# Altium PCB PCBSM.PcbDoc
Units mil, origin at the board's own origin, x right, y up, seen from the top; angles counter-clockwise.
Board outline 11240 x 9575 mil, 2 copper layers (Top Layer, Bottom Layer); 128 components, 74 nets, 410 pads, 4 vias.
Unrouted connection lines stored in the file: 65.
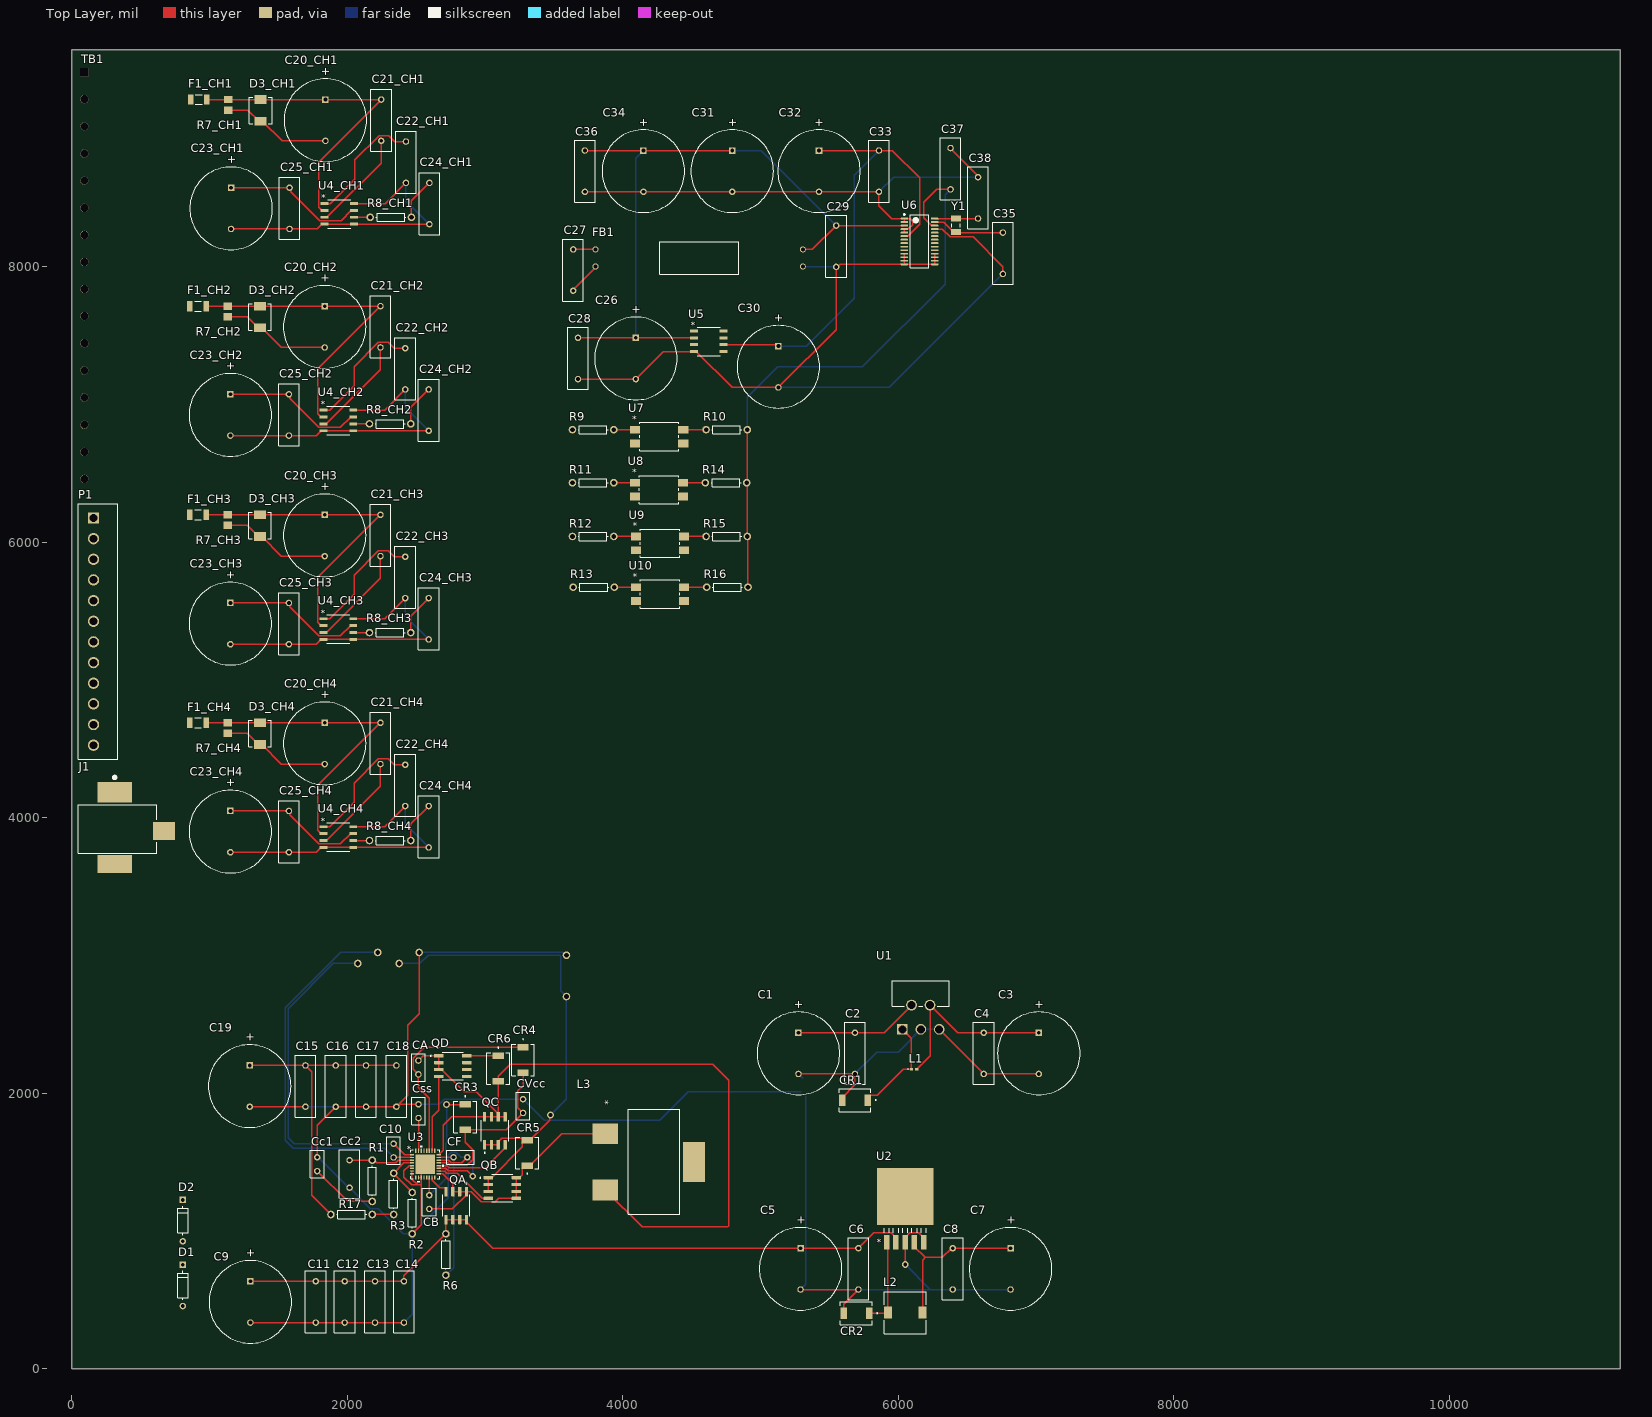
[diagram p0: Top Layer view]
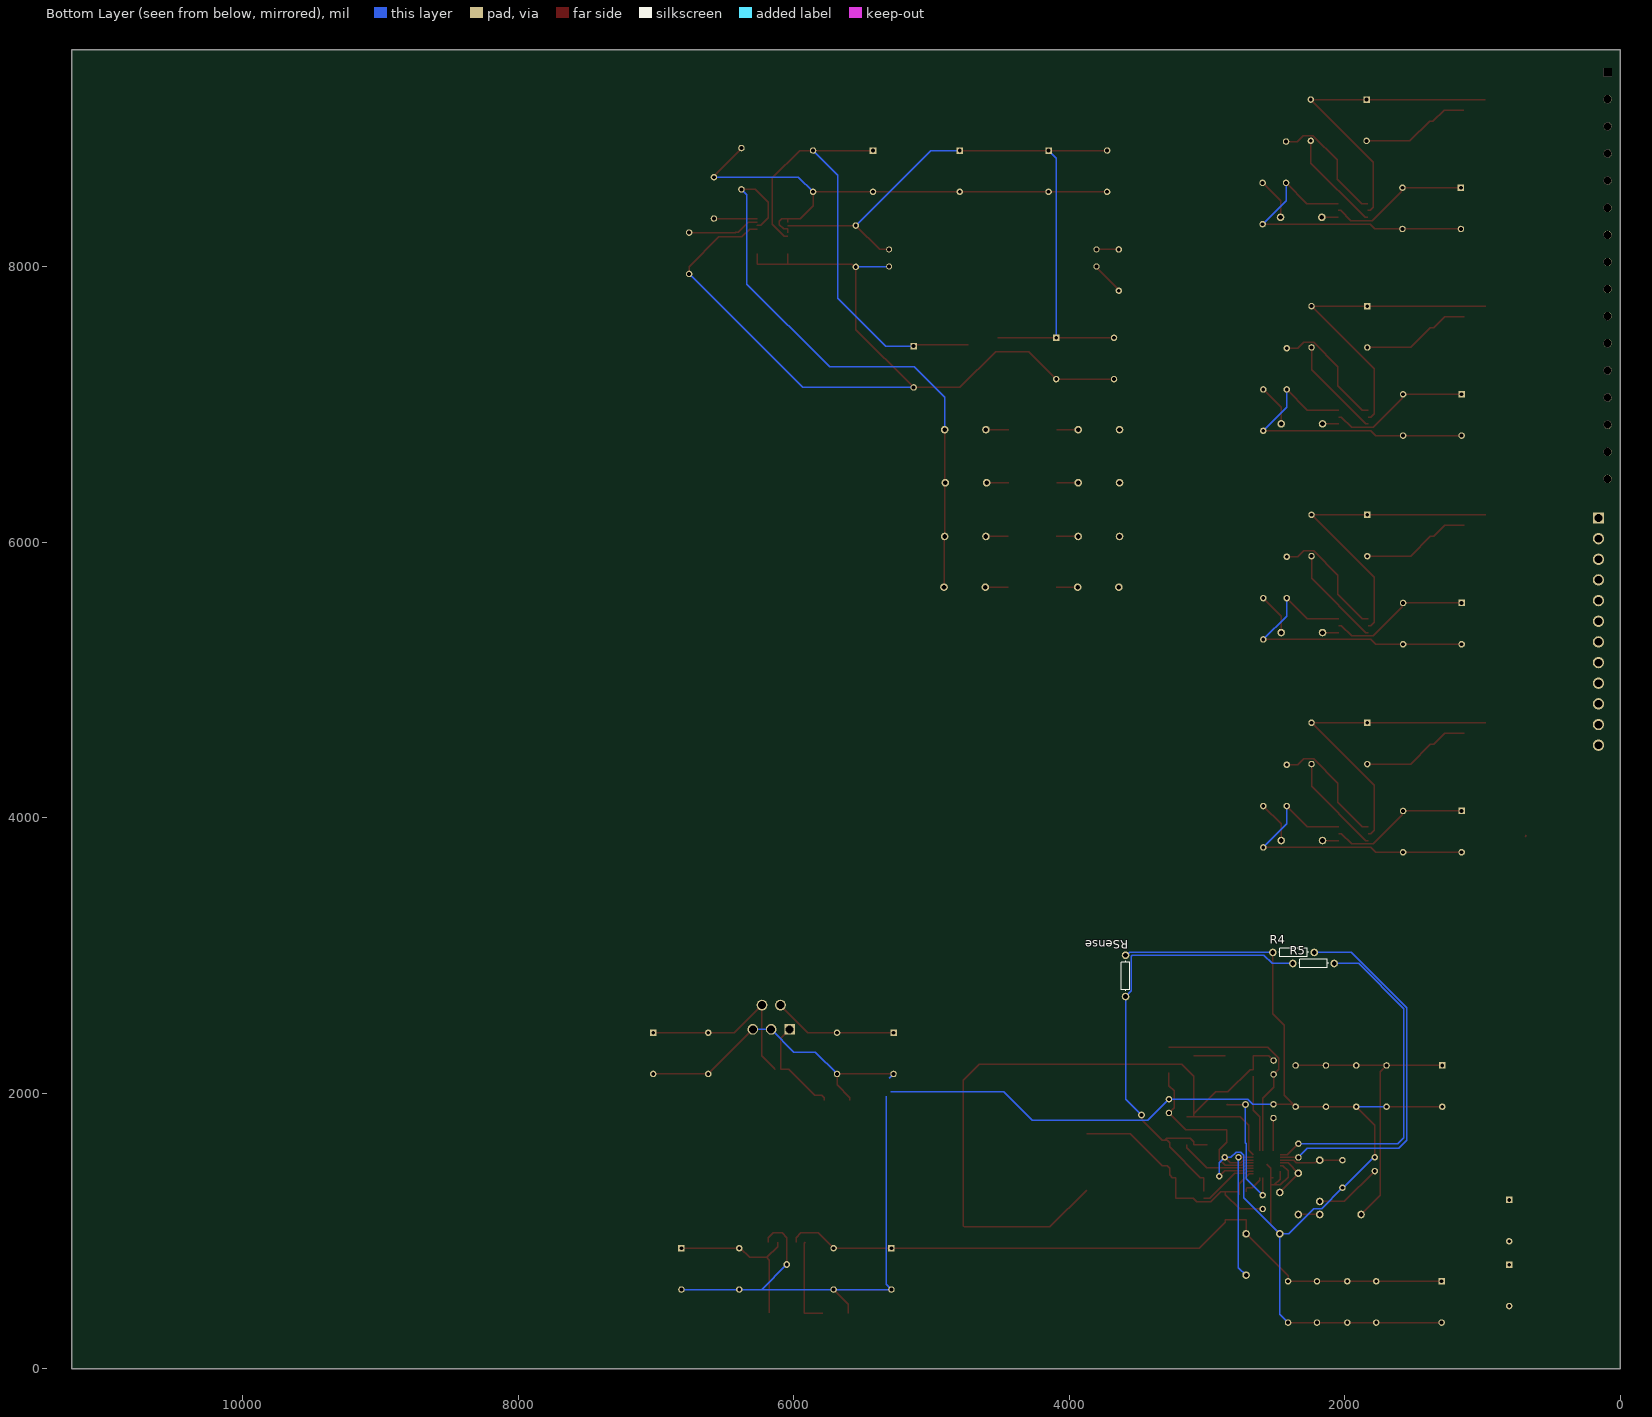
[diagram p1: Bottom Layer view, seen from below]

## Layer stack, top to bottom
Top Solder: solder mask 0.4, Solder Resist, Dk 3.5
Top Layer: signal copper 1.4
Dielectric 1: dielectric 12.6, FR-4, Dk 4.8
Bottom Layer: signal copper 1.4
Bottom Solder: solder mask 0.4, Solder Resist, Dk 3.5

## Board outline
0,0 11240,0 11240,9575 0,9575

## Design rules (kind name [scope] priority, off if disabled: settings)
Clearance [All] p1: gap=9 ignorepadtopadclearanceinfootprint=FALSE except(0: Arc-Hole Track-Hole SMDPad-Hole THPad-Hole Via-Hole Fill-Hole Poly-Hole Region-Hole Text-Hole; 10: Arc-Text Track-Text SMDPad-Text THPad-Text Via-Text Fill-Text Poly-Text Region-Text Text-Text)
Height [All] p1 off: minheight=0 maxheight=1000 prefheight=500
PolygonConnect [All] p1: connectstyle=Relief reliefconductorwidth=10 reliefentries=4 polygonreliefangle="90 Angle" airgapwidth=10
RoomDefinition IN [InComponentClass('IN')] p1: confinementstyle=ConfineIn formatcopy=TRUE lockcomponents=FALSE outline 3538.98,5477.76 6908.98,5477.76 6908.98,9272.76 3538.98,9272.76
RoomDefinition U_5VBuckConverterSM [InComponentClass('U_5VBuckConverterSM')] p2: confinementstyle=ConfineIn formatcopy=TRUE lockcomponents=FALSE outline 4890,1735 7475,1735 7475,3285 4890,3285
RoomDefinition "Industrial Instrumentation Controller" [InComponentClass('Industrial Instrumentation Controller')] p3: confinementstyle=ConfineIn formatcopy=TRUE lockcomponents=FALSE outline 35,3518.15 780,3518.15 780,9557.05 35,9557.05
RoomDefinition CH1 [InComponentClass('CH1')] p4: confinementstyle=ConfineIn formatcopy=TRUE lockcomponents=FALSE outline 810,8085.2 2930,8085.2 2930,9560.2 810,9560.2
RoomDefinition PWR [InComponentClass('PWR')] p5: confinementstyle=ConfineIn formatcopy=TRUE lockcomponents=FALSE outline 890,1360 740,1360 740,315 890,315
RoomDefinition U_24VBuckBoostConverterSM [InComponentClass('U_24VBuckBoostConverterSM')] p6: confinementstyle=ConfineIn formatcopy=TRUE lockcomponents=FALSE outline 925.29,0 4815.29,0 4815.29,3150 925.29,3150
RoomDefinition CH4 [InComponentClass('CH4')] p7: confinementstyle=ConfineIn formatcopy=TRUE lockcomponents=FALSE outline 805,3560 2925,3560 2925,5035 805,5035
RoomDefinition CH3 [InComponentClass('CH3')] p8: confinementstyle=ConfineIn formatcopy=TRUE lockcomponents=FALSE outline 805,5070 2925,5070 2925,6545 805,6545
RoomDefinition CH2 [InComponentClass('CH2')] p9: confinementstyle=ConfineIn formatcopy=TRUE lockcomponents=FALSE outline 805,6585 2925,6585 2925,8060 805,8060
RoomDefinition U_3.3VBuckConverterSM [InComponentClass('U_3.3VBuckConverterSM')] p10: confinementstyle=ConfineIn formatcopy=TRUE lockcomponents=FALSE outline 7485,200 7485,1590 4910,1590 4910,200
RoutingVias [All] p1: holewidth=28 width=50 viastyle="Through Hole" minholewidth=28 minwidth=50 maxholewidth=28 maxwidth=50
SolderMaskExpansion [All] p1: expansion=4 istentingtop=FALSE
Width [All] p1: maxlimit=10 minlimit=10 preferedwidth=10
29 further rules are at their usual default settings.

## Classes and differential pairs
channel class CurrentSensingSM: CH1 CH2 CH3 CH4
component class CH4: C20_CH4 C21_CH4 C22_CH4 C23_CH4 C24_CH4 C25_CH4 D3_CH4 F1_CH4 R7_CH4 R8_CH4 U4_CH4
component class CH3: C20_CH3 C21_CH3 C22_CH3 C23_CH3 C24_CH3 C25_CH3 D3_CH3 F1_CH3 R7_CH3 R8_CH3 U4_CH3
component class CH2: C20_CH2 C21_CH2 C22_CH2 C23_CH2 C24_CH2 C25_CH2 D3_CH2 F1_CH2 R7_CH2 R8_CH2 U4_CH2
component class CH1: C20_CH1 C21_CH1 C22_CH1 C23_CH1 C24_CH1 C25_CH1 D3_CH1 F1_CH1 R7_CH1 R8_CH1 U4_CH1
component class PWR: D1 D2
component class IN: C26 C27 C28 C29 C30 C31 C32 C33 C34 C35 C36 C37 C38 FB1 R9 R10 R11 R12 R13 R14 R15 R16 U5 U6 U7 U8 U9 U10 Y1
component class "Industrial Instrumentation Controller": J1 P1 TB1
component class U_24VBuckBoostConverterSM: C9 C10 C11 C12 C13 C14 C15 C16 C17 C18 C19 CA CB Cc1 Cc2 CF CR3 CR4 CR5 CR6 Css CVcc L3 QA QB QC QD R1 R2 R3 R4 R5 R6 R17 RSense U3
component class U_5VBuckConverterSM: C1 C2 C3 C4 CR1 L1 U1
component class U_3.3VBuckConverterSM: C5 C6 C7 C8 CR2 L2 U2

## Components (designator, comment, footprint, x,y, rotation, side; value= is the part's Value field where it differs from the comment)
C1 "Cap Pol1" RB7.6-15 5275,2290 r90 top value=47uF
C2 "Cap" RAD-0.3 5685,2290 r90 top value=0.1uF
C3 "Cap Pol1" RB7.6-15 7020,2290 r90 top value=47uF
C4 "Cap" RAD-0.3 6620,2290 r90 top value=0.1uF
C5 "Cap Pol1" RB7.6-15 5290,725 r90 top value=47uF
C6 "Cap" RAD-0.3 5710,725 r90 top value=0.1uF
C7 "Cap Pol1" RB7.6-15 6815,725 r90 top value=47uF
C8 "Cap" RAD-0.3 6395,725 r90 top value=0.1uF
C9 "Cap Pol1" RB7.6-15 1295.29,484.71 r90 top value=100uF
C10 "Cap" RAD-0.1 2335.29,1583.92 r270 top value=68pF
C11 "Cap" RAD-0.3 1770.29,484.71 r90 top value=4.7uF
C12 "Cap" RAD-0.3 1980.29,484.71 r90 top value=4.7uF
C13 "Cap" RAD-0.3 2200.29,484.71 r90 top value=1uF
C14 "Cap" RAD-0.3 2410.29,484.71 r90 top value=10uF
C15 "Cap" RAD-0.3 1695.29,2052.21 r90 top value=22uF
C16 "Cap" RAD-0.3 1915.29,2052.21 r90 top value=22uF
C17 "Cap" RAD-0.3 2135.29,2052.21 r90 top value=22uF
C18 "Cap" RAD-0.3 2355.29,2052.21 r90 top value=0.1uF
C19 "Cap Pol1" RB7.6-15 1290.29,2052.21 r90 top value=330uF
C20_CH1 "Cap Pol1" RB7.6-15 1840,9065 r90 top value=4.7uF (schematic designator C20)
C20_CH2 "Cap Pol1" RB7.6-15 1835,7564.8 r90 top value=4.7uF (schematic designator C20)
C20_CH3 "Cap Pol1" RB7.6-15 1835,6049.8 r90 top value=4.7uF (schematic designator C20)
C20_CH4 "Cap Pol1" RB7.6-15 1835,4539.8 r90 top value=4.7uF (schematic designator C20)
C21_CH1 "Cap" RAD-0.3 2245,9065.2 r90 top value=0.1uF (schematic designator C21)
C21_CH2 "Cap" RAD-0.3 2240,7565 r90 top value=0.1uF (schematic designator C21)
C21_CH3 "Cap" RAD-0.3 2240,6050 r90 top value=0.1uF (schematic designator C21)
C21_CH4 "Cap" RAD-0.3 2240,4540 r90 top value=0.1uF (schematic designator C21)
C22_CH1 "Cap" RAD-0.3 2425,8760.2 r90 top value=1uF (schematic designator C22)
C22_CH2 "Cap" RAD-0.3 2420,7260 r90 top value=1uF (schematic designator C22)
C22_CH3 "Cap" RAD-0.3 2420,5745 r90 top value=1uF (schematic designator C22)
C22_CH4 "Cap" RAD-0.3 2420,4235 r90 top value=1uF (schematic designator C22)
C23_CH1 "Cap Pol1" RB7.6-15 1155,8425.2 r90 top value=47uF (schematic designator C23)
C23_CH2 "Cap Pol1" RB7.6-15 1150,6925 r90 top value=47uF (schematic designator C23)
C23_CH3 "Cap Pol1" RB7.6-15 1150,5410 r90 top value=47uF (schematic designator C23)
C23_CH4 "Cap Pol1" RB7.6-15 1150,3900 r90 top value=47uF (schematic designator C23)
C24_CH1 "Cap" RAD-0.3 2595,8460.2 r90 top value=1uF (schematic designator C24)
C24_CH2 "Cap" RAD-0.3 2590,6960 r90 top value=1uF (schematic designator C24)
C24_CH3 "Cap" RAD-0.3 2590,5445 r90 top value=1uF (schematic designator C24)
C24_CH4 "Cap" RAD-0.3 2590,3935 r90 top value=1uF (schematic designator C24)
C25_CH1 "Cap" RAD-0.3 1580,8425.2 r90 top value=0.1uF (schematic designator C25)
C25_CH2 "Cap" RAD-0.3 1575,6925 r90 top value=0.1uF (schematic designator C25)
C25_CH3 "Cap" RAD-0.3 1575,5410 r90 top value=0.1uF (schematic designator C25)
C25_CH4 "Cap" RAD-0.3 1575,3900 r90 top value=0.1uF (schematic designator C25)
C26 "Cap Pol1" RB7.6-15 4093.98,7335 r90 top value=47uF
C27 "Cap" RAD-0.3 3638.98,7977.01 r90 top value=0.1uF
C28 "Cap" RAD-0.3 3673.98,7335 r90 top value=0.1uF
C29 "Cap" RAD-0.3 5548.98,8150 r90 top value=0.1uF
C30 "Cap Pol1" RB7.6-15 5128.98,7275 r90 top value=47uF
C31 "Cap Pol1" RB7.6-15 4793.98,8695 r90 top value=20uF
C32 "Cap Pol1" RB7.6-15 5423.98,8695 r90 top value=47uF
C33 "Cap" RAD-0.3 5858.98,8695 r90 top value=0.1uF
C34 "Cap Pol1" RB7.6-15 4148.98,8695 r90 top value=10uF
C35 "Cap" RAD-0.3 6758.98,8098.98 r90 top value=10pF
C36 "Cap" RAD-0.3 3723.98,8695 r90 top value=0.1uF
C37 "Cap" RAD-0.3 6378.98,8712.76 r270 top value=0.1uF
C38 "Cap" RAD-0.3 6578.98,8501.34 r270 top value=10pF
CA "Cap" RAD-0.1 2515.29,2187.21 r270 top value=220nF
CB "Cap" RAD-0.1 2594.82,1209.71 r270 top value=220nF
Cc1 "Cap" RAD-0.1 1780.29,1484.71 r270 top value=10nF
Cc2 "Cap" RAD-0.2 2015.29,1414.23 r90 top value=47pF
CF "Cap" RAD-0.1 2820.29,1534.71 r180 top value=0.1uF
CR1 "B340B-13-F" B340A-13-F 5685,1950 r180 top
CR2 "B340B-13-F" B340A-13-F 5695,402.5 r180 top
CR3 "B340B-13-F" B340A-13-F 2855.29,1827.21 r270 top
CR4 "B340B-13-F" B340A-13-F 3275.29,2242.21 r270 top
CR5 "B340B-13-F" B340A-13-F 3305.29,1567.21 r90 top
CR6 "B340B-13-F" B340A-13-F 3095.29,2179.71 r270 top
Css "Cap" RAD-0.1 2516.08,1869.71 r270 top value=220nF
CVcc "Cap" RAD-0.1 3275.29,1907.21 r270 top value=4.7uF
D1 "1N4148" FP-017AG-MFG 805,605.12 r270 top
D2 "1N4148" FP-017AG-MFG 805,1075.12 r270 top
D3_CH1 "Tranzorb" SZ1SMB36CAT3G 1370,9136.5 r90 top (schematic designator D3)
D3_CH2 "Tranzorb" SZ1SMB36CAT3G 1365,7636.3 r90 top (schematic designator D3)
D3_CH3 "Tranzorb" SZ1SMB36CAT3G 1365,6121.3 r90 top (schematic designator D3)
D3_CH4 "Tranzorb" SZ1SMB36CAT3G 1365,4611.3 r90 top (schematic designator D3)
F1_CH1 "0ZCJ0005FF2E" FP-0ZCJ0005FF2E-MFG 920,9215 r0 top (schematic designator F1)
F1_CH2 "0ZCJ0005FF2E" FP-0ZCJ0005FF2E-MFG 915,7714.8 r0 top (schematic designator F1)
F1_CH3 "0ZCJ0005FF2E" FP-0ZCJ0005FF2E-MFG 915,6199.8 r0 top (schematic designator F1)
F1_CH4 "0ZCJ0005FF2E" FP-0ZCJ0005FF2E-MFG 915,4689.8 r0 top (schematic designator F1)
FB1 "FB20011-3B-RC" FB20011 4553.98,8065 r0 top
J1 "RASM722X" SWIT-RASM722X_V 490,3925 r270 top
L1 "Inductor" 0402-A 6114.68,2175 r0 top value=100uH
L2 "Inductor" B82472P6683M000 6050,407.5 r0 top value=68uH
L3 "SER2013-472MLB" SER2013-472MLB 4225.29,1502.21 r270 top value=4.7uH
P1 "691701310012B" 691701310012B 190,5352.05 r270 top
QA "TSM120N06LCS_RLG" SOP127P600X200-8N 2790.29,1184.71 r270 top
QB "TSM120N06LCS_RLG" SOP127P600X200-8N 3125.29,1312.21 r0 top
QC "TSM120N06LCS_RLG" SOP127P600X200-8N 3070.29,1727.21 r90 top
QD "TSM120N06LCS_RLG" SOP127P600X200-8N 2765.29,2197.21 r0 top
R1 "Res1" AXIAL-0.3 2180.29,1364.23 r90 top value=100k
R2 "Res1" AXIAL-0.3 2470.29,1129.71 r270 top value=1k
R3 "Res1" AXIAL-0.3 2335.29,1269.71 r270 top value=28k
R4 "Res1" AXIAL-0.3 2370.29,3022.21 r180 bottom value=100
R5 "Res1" AXIAL-0.3 2225.29,2942.21 r180 bottom value=100
R6 "Res1" AXIAL-0.3 2715.29,829.71 r270 top value=10
R7_CH1 "RG2012N-101-W-T1" RESC2013X50X40ML20T20 1135,9176.61 r90 top value=100 (schematic designator R7)
R7_CH2 "RG2012N-101-W-T1" RESC2013X50X40ML20T20 1130,7676.42 r90 top value=100 (schematic designator R7)
R7_CH3 "RG2012N-101-W-T1" RESC2013X50X40ML20T20 1130,6161.42 r90 top value=100 (schematic designator R7)
R7_CH4 "RG2012N-101-W-T1" RESC2013X50X40ML20T20 1130,4651.42 r90 top value=100 (schematic designator R7)
R8_CH1 "Res1" AXIAL-0.3 2315,8360.2 r0 top value=1K (schematic designator R8)
R8_CH2 "Res1" AXIAL-0.3 2310,6860 r0 top value=1K (schematic designator R8)
R8_CH3 "Res1" AXIAL-0.3 2310,5345 r0 top value=1K (schematic designator R8)
R8_CH4 "Res1" AXIAL-0.3 2310,3835 r0 top value=1K (schematic designator R8)
R9 "Res1" AXIAL-0.3 3783.98,6817.76 r180 top value=4.7k
R10 "Res1" AXIAL-0.3 4753.98,6817.76 r0 top value=4.7k
R11 "Res1" AXIAL-0.3 3783.98,6432.76 r180 top value=4.7k
R12 "Res1" AXIAL-0.3 3783.98,6042.76 r180 top value=4.7k
R13 "Res1" AXIAL-0.3 3788.48,5674.5 r180 top value=4.7k
R14 "Res1" AXIAL-0.3 4748.98,6432.76 r0 top value=4.7k
R15 "Res1" AXIAL-0.3 4753.98,6042.76 r0 top value=4.7k
R16 "Res1" AXIAL-0.3 4758.48,5674.5 r0 top value=4.7k
R17 "Res1" AXIAL-0.3 2030.29,1119.71 r180 top value=1k
RSense "Res1" AXIAL-0.3 3590.29,2852.21 r90 bottom value=18m
TB1 "OSTOQ167151" OSTOQ167151 90,9413.7 r0 top
U1 "LM2595T-5.0/NOPB" LM2595ST-5P0 6297,2983 r0 top
U2 "LM2595SX-3.3/NOPB" LM2595SX-3P3 6050,1245 r0 top
U3 "LTC3780EUH#TRPBF" LTC3780EUH 2565.29,1484.71 r0 top
U4_CH1 "LT1990ACS8#PBF" LT1990ACS8-PBF 1940,8385.2 r0 top (schematic designator U4)
U4_CH2 "LT1990ACS8#PBF" LT1990ACS8-PBF 1935,6885 r0 top (schematic designator U4)
U4_CH3 "LT1990ACS8#PBF" LT1990ACS8-PBF 1935,5370 r0 top (schematic designator U4)
U4_CH4 "LT1990ACS8#PBF" LT1990ACS8-PBF 1935,3860 r0 top (schematic designator U4)
U5 "ISL21090BFB825Z-TK" ISL21090BFB825Z-TK 4623.98,7460 r0 top
U6 "AD7718BRUZ" AD7718BRUZ 6153.98,8185 r0 top
U7 "PS2501L-1-A" PS2501L-1-A 4263.98,6767.76 r0 top
U8 "PS2501L-1-A" PS2501L-1-A 4263.48,6382.76 r0 top
U9 "PS2501L-1-A" PS2501L-1-A 4268.48,5992.76 r0 top
U10 "PS2501L-1-A" PS2501L-1-A 4268.48,5624.5 r0 top
Y1 "ABS07-32.768KHZ-T" FP-ABS07-MFG 6418.98,8302.13 r270 top

## Footprints (in the part's own frame and the unit in brackets; to place one, negate y for a bottom-side part, rotate by r counter-clockwise, add the part's x,y. Pads: shape width x height; smd on the part's side, far side on the other; paste and mask are expansions set on the pad)
0402-A [mm] "Chip Inductor, Body 1.0x0.5mm, IPC High Density"
  rect 0.6x0.5 smd: 1(-0.5,0) 2(0.5,0)
  silkscreen extent -1.1,-0.15 -1.1,0.15, body extent -0.55,-0.3 0.55,0.3, height 0.55
691701310012B [mm] "Vertical PCB Header THR Type, pitch 3.81mm, 12p"
  rect 2.1x2.1 hole 1.4: 1(-20.955,-0.85)
  round 2.1 hole 1.4: 2(-17.145,-0.85) 3(-13.335,-0.85) 4(-9.525,-0.85) 5(-5.715,-0.85) 6(-1.905,-0.85) 7(1.905,-0.85) 8(5.715,-0.85) 9(9.525,-0.85) 10(13.335,-0.85) 11(17.145,-0.85) 12(20.955,-0.85)
  silkscreen extent -23.55,-3.65 23.55,3.65, body extent -23.55,-3.65 23.55,3.65, height 9.25
AD7718BRUZ [mm] "TSOP, 28-Leads, Body 9.7x4.4mm, Pitch 0.65mm, IPC High Density"
  oval 1.4x0.35 smd: 1(-2.8,4.225) 2(-2.8,3.575) 3(-2.8,2.925) 4(-2.8,2.275) 5(-2.8,1.625) 6(-2.8,0.975) 7(-2.8,0.325) 8(-2.8,-0.325) 9(-2.8,-0.975) 10(-2.8,-1.625) 11(-2.8,-2.275) 12(-2.8,-2.925) 13(-2.8,-3.575) 14(-2.8,-4.225) 15(2.8,-4.225) 16(2.8,-3.575) 17(2.8,-2.925) 18(2.8,-2.275) 19(2.8,-1.625) 20(2.8,-0.975) 21(2.8,-0.325) 22(2.8,0.325) 23(2.8,0.975) 24(2.8,1.625) 25(2.8,2.275) 26(2.8,2.925) 27(2.8,3.575) 28(2.8,4.225)
  silkscreen extent -2.92,-4.9 1.7,5.07, body extent -2.25,-4.9 2.25,4.9, height 1.2
AXIAL-0.3 [mm] "Axial Device, Thru-Hole; 2 Leads; 0.3 in Pin Spacing"
  round 1.4 hole 0.85: 1(-3.81,0) 2(3.81,0)
  silkscreen extent -2.77,-0.76 2.77,0.76
B340A-13-F [mil]
  rect 47x82 smd paste+0 mask+0: 1(-92.5,0) 2(92.5,0)
  silkscreen extent -154,-83 115,83, body extent 0,0 10,10, height 10
B82472P6683M000 [mil]
  rect 59x87 smd paste+0 mask+0: 1(-126,0) 2(126,0)
  silkscreen extent -152,-152 152,152, body extent -147,-148 147,148, height 177
FB20011 [mm]
  round 1.11 hole 0.71: 1(-19.115,1.575) 2(-19.115,-1.575) 3(19.115,-1.575) 4(19.115,1.575)
  silkscreen extent -7.3,-3 7.3,3
FP-0ZCJ0005FF2E-MFG [mm]
  rect 1x1.9 smd paste+0 mask+0: 1(-1.5,0) 2(1.5,0)
  silkscreen extent -0.62,-0.9 0.62,0.9, body extent -2.1,-1.05 2.1,1.05, height 0.25
FP-017AG-MFG [mm]
  rect 1.2x1.2 hole 0.7 paste-1000 mask+0: 1(-3.813,0)
  round 1.2 hole 0.7 paste-1000 mask+0: 2(3.813,0)
  silkscreen extent -2.68,-0.95 2.68,0.95, body extent -4.51,-1.05 4.51,1.05, height 0.25
FP-ABS07-MFG [mm]
  rect 1.1x1.9 smd paste+0 mask+0: 1(-1.25,0) 2(1.25,0)
  silkscreen extent -0.32,-0.8 0.33,0.8, body extent -1.9,-1.05 1.9,1.05, height 0.25
ISL21090BFB825Z-TK [mil]
  rect 57x22 smd paste+0 mask+0: 1(-107.5,75) 2(-107.5,25) 3(-107.5,-25) 4(-107.5,-75) 5(107.5,-75) 6(107.5,-25) 7(107.5,25) 8(107.5,75)
  silkscreen extent -84,-104 84,103, body extent -122,-99 122,99, height 68
LM2595ST-5P0 [mil]
  rect 78x78 hole 58: 1(-268,-519)
  round 78 hole 58: 2(-201,-343) 3(-134,-519) 4(-67,-343) 5(0,-519)
  silkscreen extent -342,-352 74,-167, body extent -342,-546 72,-170, height 1074
LM2595SX-3P3 [mil]
  rect 40x106 smd: 1(-134,-326) 2(-67,-326) 3(0,-326) 4(67,-326) 5(134,-326)
  rect 410x412 smd: 6(0,6)
  silkscreen extent -153,-259 153,-224, body extent -205,-323 205,155, height 189
LT1990ACS8-PBF [mil]
  rect 57.5x21 smd paste+0 mask+0: 1(-107.25,75) 2(-107.25,25) 3(-107.25,-25) 4(-107.25,-75) 5(107.25,-75) 6(107.25,-25) 7(107.25,25) 8(107.25,75)
  silkscreen extent -84,-104 84,104, body extent -122,-99 122,99, height 69
LTC3780EUH [mm]
  rect 0.805x0.249 smd paste+0 mask+0: 1(-2.452,1.75) 2(-2.452,1.25) 3(-2.452,0.75) 4(-2.452,0.25) 5(-2.452,-0.25) 6(-2.452,-0.75) 7(-2.452,-1.25) 8(-2.452,-1.75) 17(2.452,-1.75) 18(2.452,-1.25) 19(2.452,-0.75) 20(2.452,-0.25) 21(2.452,0.25) 22(2.452,0.75) 23(2.452,1.25) 24(2.452,1.75)
  rect 0.249x0.805 smd paste+0 mask+0: 9(-1.75,-2.452) 10(-1.25,-2.452) 11(-0.75,-2.452) 12(-0.25,-2.452) 13(0.25,-2.452) 14(0.75,-2.452) 15(1.25,-2.452) 16(1.75,-2.452) 25(1.75,2.452) 26(1.25,2.452) 27(0.75,2.452) 28(0.25,2.452) 29(-0.25,2.452) 30(-0.75,2.452) 31(-1.25,2.452) 32(-1.75,2.452)
  rect 3.55x3.55 smd paste-1.762 mask+0: 33(0,0)
  silkscreen extent -2.68,-3.36 3.36,3.36, body extent -2.55,-2.55 2.55,2.55, height 0.8
OSTOQ167151 [mil]
  rect 60x60 hole 59.06 square: 1(0,0)
  round 60 hole 59.06: 2(0,-196.85) 3(0,-393.7) 4(0,-590.55) 5(0,-787.4) 6(0,-984.25) 7(0,-1181.1) 8(0,-1377.95) 9(0,-1574.8) 10(0,-1771.65) 11(0,-1968.5) 12(0,-2165.36) 13(0,-2362.21) 14(0,-2559.06) 15(0,-2755.91) 16(0,-2952.76)
PS2501L-1-A [mil]
  rect 73x57 smd paste+0 mask+0: 1(-174.5,50) 2(-174.5,-50) 3(174.5,-50) 4(174.5,50)
  silkscreen extent -143,-102 143,102, body extent -197,-97 197,97, height 150
RAD-0.1 [mm] "Radial Cap, Thru-Hole; 2 Leads; 0.1 in Pin Spacing"
  round 1.2 hole 0.7: 1(-1.27,0) 2(1.27,0)
  silkscreen extent -2.54,-1.27 2.54,1.27
RAD-0.2 [mm] "Radial Cap, Thru-Hole; 2 Leads; 0.2 in Pin Spacing"
  round 1.2 hole 0.7: 1(-2.54,0) 2(2.54,0)
  silkscreen extent -4.44,-1.91 4.44,1.91
RAD-0.3 [mm] "Radial Cap, Thru-Hole; 2 Leads; 0.3 in Pin Spacing"
  round 1.2 hole 0.7: 1(-3.81,0) 2(3.81,0)
  silkscreen extent -5.71,-1.91 5.71,1.91
RB7.6-15 [mm] "Polarized Capacitor (Radial); 2 Leads"
  rect 1.2x1.2 hole 0.7: 1(3.81,0)
  round 1.2 hole 0.7: 2(-3.81,0)
  silkscreen extent -7.62,-7.62 7.62,7.62
RESC2013X50X40ML20T20 [mm] "Chip Resistor, 2-Leads, Body 2.00x1.25mm, IPC Low Density"
  rect 1.35x1.55 smd: 1(-0.975,0) 2(0.975,0)
  body extent -1.1,-0.72 1.1,0.72, height 0.5
SER2013-472MLB [mil]
  rect 150x185 smd paste+0 mask+0: 1(-205,-352.5) 2(205,-352.5)
  rect 290x160 smd paste+0 mask+0: 3(0,290)
  silkscreen extent -383,-188 383,188, body extent 0,0 10,10, height 10
SOP127P600X200-8N [mm]
  rrect25% 1.76x0.6 smd: 1(-2.58,1.905) 2(-2.58,0.635) 3(-2.58,-0.635) 4(-2.58,-1.905) 5(2.58,-1.905) 6(2.58,-0.635) 7(2.58,0.635) 8(2.58,1.905)
  silkscreen extent -4.16,-2.53 1.95,2.53, body extent -3,-2.42 3,2.42, height 2.1
SWIT-RASM722X_V [mm] "SMD, 3-Leads, Body 14.5x9mm"
  rect 3.81x6.35 smd: 1(-6.645,-4.57)
  rect 3.3x4.06 smd: 2(0.545,4.57)
  rect 3.3x6.35 smd: 3(6.645,-4.57)
  silkscreen extent -9.6,-11.3 4.6,3.2, body extent -7.5,-11.23 7.5,5.84, height 11.1
SZ1SMB36CAT3G [mil]
  rect 63x87 smd paste+0 mask+0: 1(-78.5,0) 2(78.5,0)
  silkscreen extent -96,-83 96,83, body extent -110,-78 110,78, height 95

## Part data
C1 C3 C5 C7 C9 C19: "Polarized Capacitor (Radial)", Voltage Rating=35V, LatestRevisionDate=17-Jul-2002, LatestRevisionNote="Re-released for DXP Platform.", PackageDescription="Polarized Capacitor (Radial); 2 Leads", PackageReference=RB7.6-15, Published=8-Jun-2000, Publisher="Altium Limited"
C2 C4 C6 C8 C21_CH1 C21_CH2 C21_CH3 C21_CH4 C25_CH1 C25_CH2 C25_CH3 C25_CH4 C27 C28 C29 C33 C35 C36 C37 C38: "Capacitor", Voltage Rating=50V, LatestRevisionDate=17-Jul-2002, LatestRevisionNote="Re-released for DXP Platform.", PackageDescription="Radial Cap, Thru-Hole; 2 Leads; 0.3 in Pin Spacing", PackageReference=RAD-0.3, Published=8-Jun-2000, Publisher="Altium Limited"
C10 CA CB Cc1 Cc2 CF Css CVcc: "Capacitor", LatestRevisionDate=17-Jul-2002, LatestRevisionNote="Re-released for DXP Platform.", PackageDescription="Radial Cap, Thru-Hole; 2 Leads; 0.3 in Pin Spacing", PackageReference=RAD-0.3, Published=8-Jun-2000, Publisher="Altium Limited"
C11 C12 C13 C14 C15 C16 C17 C18: "Capacitor", Voltage Rating=35V, LatestRevisionDate=17-Jul-2002, LatestRevisionNote="Re-released for DXP Platform.", PackageDescription="Radial Cap, Thru-Hole; 2 Leads; 0.3 in Pin Spacing", PackageReference=RAD-0.3, Published=8-Jun-2000, Publisher="Altium Limited"
C20_CH1 C20_CH2 C20_CH3 C20_CH4: "Polarized Capacitor (Radial)", Voltage Rating=25V, LatestRevisionDate=17-Jul-2002, LatestRevisionNote="Re-released for DXP Platform.", PackageDescription="Polarized Capacitor (Radial); 2 Leads", PackageReference=RB7.6-15, Published=8-Jun-2000, Publisher="Altium Limited"
C22_CH1 C22_CH2 C22_CH3 C22_CH4 C24_CH1 C24_CH2 C24_CH3 C24_CH4: "Capacitor", Voltage Rating=10V, LatestRevisionDate=17-Jul-2002, LatestRevisionNote="Re-released for DXP Platform.", PackageDescription="Radial Cap, Thru-Hole; 2 Leads; 0.3 in Pin Spacing", PackageReference=RAD-0.3, Published=8-Jun-2000, Publisher="Altium Limited"
C23_CH1 C23_CH2 C23_CH3 C23_CH4 C26 C30 C31 C32: "Polarized Capacitor (Radial)", Voltage Rating=6.3V, LatestRevisionDate=17-Jul-2002, LatestRevisionNote="Re-released for DXP Platform.", PackageDescription="Polarized Capacitor (Radial); 2 Leads", PackageReference=RB7.6-15, Published=8-Jun-2000, Publisher="Altium Limited"
C34: "Polarized Capacitor (Radial)", Voltage Rating=50V, LatestRevisionDate=17-Jul-2002, LatestRevisionNote="Re-released for DXP Platform.", PackageDescription="Polarized Capacitor (Radial); 2 Leads", PackageReference=RB7.6-15, Published=8-Jun-2000, Publisher="Altium Limited"
CR1 CR2 CR3 CR4 CR5 CR6: "No Description Available", Mfr_Name="Diodes Inc", Copyright="Copyright (C) 2022 Ultra Librarian. All rights reserved.", Digi-Key_Part_Number_1=B340B-FDITR-ND, Digi-Key_Part_Number_2=B340B-FDIDKR-ND, Digi-Key_Part_Number_3=B340B-FDICT-ND, Manufacturer_Part_Number=B340B-13-F, RefDes=RefDes, Type=DEV
D1 D2: library part CMP-07163-000046-1, "DIODE GEN PURP 100V 200MA DO35", Average Rectified Current=200mA, Capacitance=4pF, Case/Package=DO-35, Current=4A, Forward Current=300mA, Forward Voltage=1V, Max Forward Surge Current (Ifsm)=1A, Max Operating Temperature=175°C, Max Power Dissipation=500mW, Max Repetitive Reverse Voltage (Vrrm)=100V, Max Reverse Current=5uA, Min Operating Temperature=-65°C, Package Quantity=2000, Contact Plating=Tin, Current Rating=200mA, Diameter=1.91mm, Element Configuration=Single, Height=4.56mm, Lead Free="Lead Free", Length=4.56mm, Max Reverse Voltage (DC)=100V, Max Surge Current=4A, Mount="Through Hole", Number of Pins=2, Output Current=200mA, Outside Diameter=1.85mm, Packaging=Bulk, Peak Non-Repetitive Surge Current=4A, Polarity=Standard, Power Dissipation=500mW, Radiation Hardening=No, REACH SVHC="No SVHC", Recovery Time=4ns, Reverse Recovery Time=4ns, Reverse Voltage=100V, Series=-, Voltage=100V, Voltage Rating (DC)=100V, Weight=0.01lb, Width=1.91mm
D3_CH1 D3_CH2 D3_CH3 D3_CH4: "1SMB Series 600 W 36 V Bi-Directional Surface Mount TVS Diode - DO-214AA", Breakdown Voltage=40V, Case/Package=SMB, Clamping Voltage=58.1V, Leakage Current=5uA, Manufacturer="ON Semiconductor", Manufacturer Part Number=SZ1SMB36CAT3G, Max Operating Temperature=150°C, Max Power Dissipation=600W, Min Operating Temperature=-65°C, Package Quantity=2500, Peak Pulse Current=10.3A, Power Line Protection=No, Resistor Type=Zener, Reverse Standoff Voltage=36V, Supplier Part Number 1=76T7971, Test Current=1mA, Category="TVS Diodes", ComponentLink1Description=https://datasheet.ciiva.com/11313/1smb10cat3-d-11313549.pdf?src-supplier=Avnet, ComponentLink1URL=https://datasheet.ciiva.com/11313/1smb10cat3-d-11313549.pdf?src-supplier=Avnet, ComponentLink2Description=https://datasheet.ciiva.com/354/1smb10cat3-d-354502.pdf?src-supplier=Digi-Key, ComponentLink2URL=https://datasheet.ciiva.com/354/1smb10cat3-d-354502.pdf?src-supplier=Digi-Key, Diode Type=ZENER, Direction=Bidirectional, Element Configuration=Single, ESD Protection=Yes, Height=2.41mm, LatestRevisionDate=17-Jul-2002, LatestRevisionNote="Re-released for DXP Platform.", Lead Free="Lead Free", Length=4.57mm, Max Reverse Leakage Current=5uA, Min Breakdown Voltage=40V, Mount="Surface Mount", Number of Bidirectional Channels=1, Number of Elements=1, Number of Pins=2, PackageDescription="Axial Lead Diode", PackageReference=DO-7, Packaging="Tape and Reel", Peak Pulse Power=600W, Polarity=Bidirectional, Published=24-Mar-1999, Publisher="Altium Limited", Reverse Breakdown Voltage=40V, RoHS=Yes, RoHS Compliant=Yes, Series="Automotive, AEC-Q101", Supplier 1=Newark, Width=3.81mm
F1_CH1 F1_CH2 F1_CH3 F1_CH4: library part CMP-16043-000008-1, "PTC RESET FUSE 60V 50MA 1206", Case Code (Imperial)=1206, Case Code (Metric)=3216, Hold Current=50mA, Max Current Rating=10A, Max Operating Temperature=85°C, Max Voltage Rating (DC)=60V, Min Operating Temperature=-40°C, Package Quantity=1, Power Dissipation=400mW, Trip Current=150mA, Approvals=UL, Case/Package=1206, Contact Plating=Tin, Lead Free="Lead Free", Mount="Surface Mount", Number of Terminals/Pins=2, Packaging="Tape and Reel", RoHS Compliant=Yes, Time to Trip=1.5s
FB1: library part FB20011
J1: library part CMP-1772-00002-1, "Power Jack, 5 A, 250 V, 3-Pin SMD, RoHS, Bulk", ComponentLink1Description="Manufacturer URL", ComponentLink1URL=http://www.switchcraft.com/, ComponentLink2Description=Datasheet, ComponentLink2URL=http://www.switchcraft.com/Drawings/rasm732x_cd.pdf, DatasheetVersion="Rev. A, 09/2005", PackageDescription="3-Pin Surface Mount Device, Body 14.5 x 9 mm", PackageReference=RASM722X
L1: "Ind Power Shielded Wirewound 100uH 20% 100KHz 1.6A Carrier T/R", Case/Package=Nonstandard, Current Rating=1.6A, DC Resistance (DCR)=187mR, Inductance=100uH, Manufacturer=Sumida, Manufacturer Part Number=CDRH125/LDNP-101MC, Max Operating Temperature=100°C, Min Operating Temperature=-40°C, Package Quantity=1, Supplier Part Number 1=308-1544-1-ND, Test Frequency=100kHz, Tolerance=20%, Category="Fixed Inductors", Code_IEC=1005, Code_JEITA=0402, ComponentLink1Description=http://www.mouser.com/ds/2/390/CDRH125LD-523473.pdf?src-supplier=Mouser, ComponentLink1URL=http://www.mouser.com/ds/2/390/CDRH125LD-523473.pdf?src-supplier=Mouser, ComponentLink2Description=http://products.sumida.com/products/pdf/CDRH125,CDRH125LD.pdf?src-supplier=Digi-Key, ComponentLink2URL=http://products.sumida.com/products/pdf/CDRH125,CDRH125LD.pdf?src-supplier=Digi-Key, ComponentLink3Description=http://www.sumida.com/products/pdf/CDRH125,CDRH125LD.pdf?src-supplier=Avnet, ComponentLink3URL=http://www.sumida.com/products/pdf/CDRH125,CDRH125LD.pdf?src-supplier=Avnet, ComponentLink4Description=http://www.sumida.com/products/pdf/CDRH125,CDRH125LD.pdf?src-supplier=Future+Electronics, ComponentLink4URL=http://www.sumida.com/products/pdf/CDRH125,CDRH125LD.pdf?src-supplier=Future+Electronics, Core Material=Ferrite, Depth=12.3mm, Height=6mm, Height - Seated (Max)=0.236inch, LatestRevisionDate=29-May-2009, LatestRevisionNote="IPC-7351 Footprint Added.", Lead Free="Lead Free", Length=0.472inch, Max DC Current=1.6A, Mount="Surface Mount", PackageDescription="Chip Inductor", PackageReference=0402-A, Packaging="Tape and Reel", Pricing 1="1=1.46000, 10=1.35800, 25=1.25360, 50=1.04480, 100=0.98210, 250=0.87760 (USD)", Published=8-Jun-2000, Publisher="Altium Limited", Radiation Hardening=No, Rated Current-Max=1.6A, RoHS=Yes, RoHS Compliant=Yes, Series=CDRH125/LD, Shielding=Shielded, Stock 1=1012, Supplier 1=Digi-Key, Termination=SMD/SMT, Width=0.472inch
L2: "Ind Power Shielded Wirewound 68uH 20% 100KHz Ferrite 820mA Blister T/R", Case/Package=SMD/SMT, DC Current=820mA, DC Resistance (DCR)=260mR, Inductance=68uH, Manufacturer="TDK EPCOS", Manufacturer Part Number=B82472P6683M000, Max DC Current=680mA, Package Quantity=1000, Supplier Part Number 1=495-77101-1-ND, Test Frequency=100kHz, Tolerance=20%, Category="Fixed Inductors", Code_IEC=1005, Code_JEITA=0402, ComponentLink1Description=https://datasheet.ciiva.com/13285/b82472g6-525414-13285823.pdf?src-supplier=Mouser, ComponentLink1URL=https://datasheet.ciiva.com/13285/b82472g6-525414-13285823.pdf?src-supplier=Mouser, Core Material=Ferrite, Depth=7.5mm, LatestRevisionDate=29-May-2009, LatestRevisionNote="IPC-7351 Footprint Added.", Length=7.5mm, Military Standard=Not, PackageDescription="Chip Inductor", PackageReference=0402-A, Packaging="Tape and Reel", Pricing 1="1=1.69000, 10=1.56600, 25=1.44520, 50=1.20440, 100=1.13220, 250=1.01172, 500=0.86718 (USD)", Published=8-Jun-2000, Publisher="Altium Limited", RoHS=Yes, RoHS Compliant=Yes, Series=B82472P6, Shielding=Shielded, Stock 1=3192, Supplier 1=Digi-Key, Termination=SMD/SMT, Weight=0.052911oz
L3: "No Description Available", Mfr_Name=Coilcraft, Copyright="Copyright (C) 2022 Ultra Librarian. All rights reserved.", Manufacturer_Part_Number=SER2013-472MLB, RefDes=RefDes, Type=DEV
P1: library part CMP-1502-01991-1, "Serie 7013 B - 3.81mm Vertical PCB Header THR Type WR-TBL, 12 pin", Manufacturer="Wurth Elektronik", Operating Temperature=-40to105degC, Datasheet URL=http://katalog.we-online.de/em/datasheet/6917013100xxB.pdf, Gender=Male, Manufacturer URL=http://www.we-online.de, Mounting Technology=SMT, Package Reference=691701310012B, Packaging=Box, Part Number=691701310012B, Pin Number=12, Pitch=3.81mm, Publisher=WurthElektronik
QA QB QC QD: "60V, 23A, Single N-Channel Power MOSFET", Package="SOP-8 Taiwan Semiconductor", Check_prices=https://www.snapeda.com/parts/TSM120N06LCS%20RLG/Taiwan+Semiconductor/view-part/?ref=eda, Digi-Key_Part_Number=TSM120N06LCSRLGTR-ND, MF="Taiwan Semiconductor", MP="TSM120N06LCS RLG", Purchase-URL="https://pricing.snapeda.com/search/part/TSM120N06LCS RLG/?ref=eda", SnapEDA_Link=https://www.snapeda.com/parts/TSM120N06LCS%20RLG/Taiwan+Semiconductor/view-part/?ref=snap
R1 R2 R3 R4 R5 R6 R8_CH1 R8_CH2 R8_CH3 R8_CH4 R9 R10 R11 R12 R13 R14 R15 R16 R17 RSense: "Resistor", LatestRevisionDate=17-Jul-2002, LatestRevisionNote="Re-released for DXP Platform.", PackageDescription="Axial Device, Thru-Hole; 2 Leads; 0.3 in Pin Spacing", PackageReference=AXIAL-0.3, Published=8-Jun-2000, Publisher="Altium Limited"
R7_CH1 R7_CH2 R7_CH3 R7_CH4: library part CMP-2001-04796-1, Manufacturer=Susumu, Part Number=RG2012N-101-W-T1
TB1: Supplier Part Number 1=ED2790-ND, Supplier 1=Digi-Key
U7 U8 U9 U10: "Optocoupler DC-IN 1-CH Transistor DC-OUT 4-Pin PDIP SMD Magazine", Case/Package=SMD/SMT, Collector Emitter Saturation Voltage=300mV, Current Transfer Ratio=300%, Forward Current=10mA, Isolation Voltage=5kV, Manufacturer=CEL, Manufacturer Part Number=PS2501L-1-L-A, Max Collector Current=50mA, Max Operating Temperature=100°C, Max Power Dissipation=150mW, Min Operating Temperature=-55°C, Output Voltage=80V, Package Quantity=100, Supplier Part Number 1=551-PS2501L-1-L-A, Category=Optocouplers, Collector Emitter Voltage (VCEO)=300mV, Collector-emitter Voltage-Max=300mV, ComponentLink1Description=https://datasheet.ciiva.com/2088/ps2501-2088124.pdf?src-supplier=Digi-Key, ComponentLink1URL=https://datasheet.ciiva.com/2088/ps2501-2088124.pdf?src-supplier=Digi-Key, Input Type=DC, Lead Free="Lead Free", Mount="Surface Mount", Number of Channels=1, Output Current per Channel=50mA, Packaging=Rail/Tube, RoHS=Yes, Series=NEPOC, Supplier 1=Mouser
Y1: library part CMP-0447-00001-4, "Crystal 32.768kHz ±20ppm (Tol) 12.5pF FUND 70kΩ 2-Pin CSMD T/R", Case/Package=CSMD, ESR (Equivalent Series Resistance)=70kR, Frequency=32.768kHz, Frequency Tolerance=20ppm, Load Capacitance=12.5pF, Max Operating Temperature=85°C, Min Operating Temperature=-40°C, Operating Frequency="32.768 kHz", Package Quantity=3000, Depth=1.5mm, Height=0.9mm, Lead Free="Lead Free", Length=3.2mm, Number of Pins=2, Packaging="Tape and Reel", Radiation Hardening=No, REACH SVHC="No SVHC", RoHS Compliant=Yes, Series=ABS07, Series Resistance=70kR, Termination=SMD/SMT, Tolerance=20ppm, Width=1.5mm

## Via types
v1: diameter 50, hole 28, Top Layer to Bottom Layer, 4 vias

## Nets (pads, with @x,y where several pads share a name; then routed paths per layer and width w, separated by ;. In a path a pad name is that pad's centre, name@x,y a point inside that pad or via, vN(x,y) a via of type N, cw(c..) or ccw(c..) an arc to the next point about the centre after c; other vN are vias at no path point)
3.3V: C7.1 C8.2 C37.2 L2.2 R10.2 R14.2 R15.2 R16.2 U2.4 U6.26 | length 5514.6
  Top Layer w10: R10.2 4901.48,6815.26 4901.48,6435.26 R14.2 4901.48,6430.26 4901.48,6045.26 R15.2 4906.23,6040.51 4906.23,5676.75 R16.2 ; U2.4 6117,886 6195.5,807.5 ; L2.2 6176,788 6195.5,807.5 ; U6.26 6263.49,8300.88 6238.87,8300.88 6183.98,8355.77 6183.98,8467.76 6278.98,8562.76 C37.2 ; C7.1 C8.2 6386.38,875 6318.88,807.5 6195.5,807.5
  Bottom Layer w10: R10.2 4903.98,7054.5 5123.98,7274.5 5738.98,7274.5 6338.98,7874.5 6338.98,8522.76 C37.2
8-30V: C1.1 C2.2 C5.1 C6.2 C9.1 C11.2 C12.2 C13.2 C14.2 D1.1 D2.1 QA.5 QA.6 QA.7 QA.8 R6.1 U1.2 U2.2 | length 6052.2
  Top Layer w10: C9.1 C11.2 C12.2 C13.2 C14.2 2410.29,674.71 R6.1 QA.5 QA.6 QA.7 QA.8 2865.29,1063.25 3053.54,875 C5.1 C6.2 5821,986 5949,986 5983,952 U2.2 ; C1.1 C2.2 5896,2440 U1.2
24V: C15.2 C16.2 C17.2 C18.2 C19.1 CR6.1 QD.5 QD.6 QD.7 QD.8 R17.2 TB1.3 TB1.7 TB1.11 TB1.15 | length 2452.6
  Top Layer w10: C19.1 C15.2 ; R17.2 1740.29,1259.71 1740.29,2157.21 C15.2 ; C18.2 C17.2 C16.2 C15.2 ; QD.8 CR6.1
A5V: C23_CH1.1 C23_CH2.1 C23_CH3.1 C23_CH4.1 C25_CH1.2 C25_CH2.2 C25_CH3.2 C25_CH4.2 C26.1 C28.2 C29.2 C31.1 C34.1 C36.2 FB1.4 U4_CH1.7 U4_CH2.7 U4_CH3.7 U4_CH4.7 U5.2 U6.3 | length 9224.1
  Top Layer w10: C23_CH4.1 C25_CH4.2 1582.13,4042.87 1582.13,4021.57 1793.2,3810.5 1949.5,3810.5 2024,3885 U4_CH4.7 ; C23_CH3.1 C25_CH3.2 1582.13,5552.87 1582.13,5531.57 1793.2,5320.5 1949.5,5320.5 2024,5395 U4_CH3.7 ; C23_CH2.1 C25_CH2.2 1582.13,7067.87 1582.13,7046.57 1793.2,6835.5 1949.5,6835.5 2024,6910 U4_CH2.7 ; C23_CH1.1 C25_CH1.2 1587.13,8568.07 1587.13,8546.77 1798.2,8335.7 1954.5,8335.7 2029,8410.2 U4_CH1.7 ; C28.2 C26.1 U5.2 ; C36.2 C34.1 C31.1 ; FB1.4 5375.98,8127.01 C29.2 5549.06,8300.08 6043.66,8300.08 U6.3
  Bottom Layer w10: C26.1 4093.98,8790 C34.1 ; C31.1 5003.98,8845 C29.2
AGND: C22_CH1.1 C22_CH2.1 C22_CH3.1 C22_CH4.1 C23_CH1.2 C23_CH2.2 C23_CH3.2 C23_CH4.2 C24_CH1.1 C24_CH2.1 C24_CH3.1 C24_CH4.1 C25_CH1.1 C25_CH2.1 C25_CH3.1 C25_CH4.1 C26.2 C28.1 C29.1 C30.2 C31.2 C32.2 C33.1 C34.2 C35.1 C36.1 C37.1 C38.1 FB1.3 TB1.4 TB1.8 TB1.12 TB1.16 U4_CH1.4 U4_CH1.5 U4_CH1.8 U4_CH2.4 U4_CH2.5 U4_CH2.8 U4_CH3.4 U4_CH3.5 U4_CH3.8 U4_CH4.4 U4_CH4.5 U4_CH4.8 U5.4 U6.1 U6.2 U6.4 U6.5 U6.11 U6.12 U6.13 U6.14 U6.15 U6.16 U6.17 U6.18 U6.25 | length 19244.7
  Top Layer w10: C23_CH4.2 C25_CH4.1 1774.5,3750 1809.5,3785 U4_CH4.4 U4_CH4.5 C24_CH4.1 ; C23_CH3.2 C25_CH3.1 1774.5,5260 1809.5,5295 U4_CH3.4 U4_CH3.5 C24_CH3.1 ; C23_CH2.2 C25_CH2.1 1774.5,6775 1809.5,6810 U4_CH2.4 U4_CH2.5 C24_CH2.1 ; C23_CH1.2 C25_CH1.1 1779.5,8275.2 1814.5,8310.2 U4_CH1.4 U4_CH1.5 C24_CH1.1 ; U4_CH4.8 2270,3935 C22_CH4.1 ; U4_CH3.8 2270,5445 C22_CH3.1 ; U4_CH2.8 2270,6960 C22_CH2.1 ; U4_CH1.8 2275,8460.2 C22_CH1.1 ; C28.1 C26.2 4293.98,7385 U5.4 4533.98,7385 4793.98,7125 C30.2 5548.98,7545 C29.1 5559.05,8000 5577.72,8018.66 U6.14 ; C36.1 C34.2 C31.2 C32.2 C33.1 5858.98,8442.76 5950.39,8351.34 U6.1 ; FB1.3 FB1.3@5308.03,8001.5 ; U6.11 U6.12 U6.13 U6.14 ; U6.5 U6.4 6044.46,8275.29 6071.51,8275.29 6103.98,8307.76 6103.98,8332.76 6085.39,8351.34 U6.1 ; U6.2 U6.1 ; U6.18 U6.17 U6.16 U6.15 U6.14 ; U6.25 6318.47,8274.57 6375.78,8217.26 6544.47,8217.26 6758.98,8002.76 C35.1 ; C37.1 6378.98,8857.05 6578.98,8657.05 C38.1
  Bottom Layer w10: C22_CH4.1 2420,3955 C24_CH4.1 ; C22_CH3.1 2420,5465 C24_CH3.1 ; C22_CH2.1 2420,6980 C24_CH2.1 ; C22_CH1.1 2425,8480.2 C24_CH1.1 ; C30.2 5935,7125 C35.1 ; FB1.3 5308.03,8001.5 5547.48,8001.5 C29.1 ; C33.1 5965.31,8651.34 C38.1
GND: C1.2 C2.1 C3.2 C4.1 C5.2 C6.1 C7.2 C8.1 C9.2 C11.1 C12.1 C13.1 C14.1 C15.1 C16.1 C17.1 C18.1 C19.2 C27.1 Cc1.1 Cc2.1 CF.1 CR1.2 CR2.2 Css.1 CVcc.1 FB1.2 J1.1 P1.12 R2.2 R4.1 RSense.2 U1.3 U1.5 U2.3 U2.5 U3.5 U3.7 U3.8 U3.10 U3.11 U3.19 U3.22 U3.33 U7.3 U8.3 U9.3 U10.3 | length 18798.9
  Top Layer w10: C19.2 C15.1 ; C9.2 C11.1 C12.1 C13.1 C14.1 ; Cc1.1@1787.56,1534.71 Cc1.1 1780.29,1767.21 C16.1 C17.1 C18.1 ; Cc2.1@2008.03,1314.23 Cc2.1 ; U3.7 U3.8 2468.74,1375.26 2509.3,1334.71 ; U3.5 2468.65,1474.77 2447.79,1474.77 2410.29,1437.28 2410.29,1389.71 2465.29,1334.71 2509.3,1334.71 ; R2.2 2535.77,1045.18 2535.77,1334.71 ; U3.10 U3.11 ; Css.1 2382.87,1919.71 2365.37,1902.21 C18.1 ; R4.1 2520.29,2577.21 2437.04,2493.95 2437.04,1983.95 C18.1 ; U3.33 2535.77,1455.18 U3.11 ; U3.19 2714.59,1455.18 2730.69,1439.08 2868.42,1439.08 v1(2910.29,1397.21) ; U3.22 2736.15,1514.23 2754.3,1496.08 2831.67,1496.08 CF.1 ; C27.1 3638.98,7833.78 3801.42,7996.22 FB1.2 ; C1.2 C2.1 5685,2060 5592.5,1967.5 CR1.2 ; C5.2 C6.1 5602.5,467.5 CR2.2 ; v1(6050,757.5) U2.3 6050,952 6084,986 6150,986 6184,952 U2.5 ; U1.5 6297,2463.5 6620,2140.5 C4.1 C3.2 ; 2509.3,1334.71 2535.77,1334.71 ; 2535.77,1334.71 U3.11
  Bottom Layer w10: C15.1 C16.1 ; Cc1.1 1787.56,1534.71 2008.03,1314.23 Cc2.1 2167.26,1162.27 2223.8,1162.27 2406.36,979.71 R2.2 ; C14.1 2470.29,394.71 R2.2 ; Css.1 2666.23,1919.71 2703.73,1957.21 CVcc.1 3429.29,1803.21 4268.63,1803.21 4475.43,2010 5295,2010 ; R4.1 3558.09,3022.21 3578.09,3002.21 RSense.2 ; v1(2910.29,1397.21) 2910.29,1494.71 CF.1 2826.57,1534.71 2787.94,1573.33 2754.3,1573.33 2731.67,1550.7 2731.67,1241.08 R2.2 ; C1.2 5307.62,2107.38 ; 5327.62,1977.38 5327.62,612.62 C5.2 C6.1 6232.5,575 ; C2.1 5844.06,2299.06 5998.06,2299.06 U1.3 U1.5 ; v1(6050,757.5) 6232.5,575 ; C7.2 C8.1 6232.5,575
NetC3_1: C3.1 C4.2 C27.2 FB1.1 L1.2 U1.4 | length 1541
  Top Layer w10: C27.2 FB1.1 ; L1.2 6136.34,2175 6141.18,2179.84 6141.18,2181.81 6230,2270.63 U1.4 6430,2440 C4.2 C3.1
NetC10_1: C10.1 R5.2 U3.1 | length 2528.2
  Top Layer w10: C10.1 2415.61,1553.6 U3.1
  Bottom Layer w10: R5.2 1897.16,2942.21 1570.29,2615.34 1570.29,1677.21 1613.58,1633.92 C10.1
NetC10_2: C10.2 R4.2 U3.2 | length 2770.2
  Top Layer w10: C10.2 U3.2
  Bottom Layer w10: R4.2 1950.29,3022.21 1550.29,2622.21 1550.29,1657.21 1608.37,1599.13 2270.09,1599.13 C10.2
NetC20_CH1_1: C20_CH1.1 C21_CH1.2 D3_CH1.2 F1_CH1.2 R7_CH1.2 U4_CH1.2 | length 2287.9
  Top Layer w10: F1_CH1.2 R7_CH1.2 D3_CH1.2 C20_CH1.1 1840.2,9215.2 C21_CH1.2 1790,8760.2 1790,8434.7 1814.5,8410.2 U4_CH1.2
NetC20_CH1_2: C20_CH1.2 C21_CH1.1 D3_CH1.1 R7_CH1.1 TB1.2 U4_CH1.3 | length 1534.2
  Top Layer w10: R7_CH1.1 1277.77,9138.23 1358,9058 D3_CH1.1 1382,9058 1525,8915 C20_CH1.2 C20_CH1.2@1840.1,8915.1 ; U4_CH1.3 1851,8360.2 2245,8754.2 C21_CH1.1 C21_CH1.1@2244.9,8915.1
NetC20_CH2_1: C20_CH2.1 C21_CH2.2 D3_CH2.2 F1_CH2.2 R7_CH2.2 U4_CH2.2 | length 2287.9
  Top Layer w10: F1_CH2.2 R7_CH2.2 D3_CH2.2 C20_CH2.1 1835.2,7715 C21_CH2.2 1785,7260 1785,6934.5 1809.5,6910 U4_CH2.2
NetC20_CH2_2: C20_CH2.2 C21_CH2.1 D3_CH2.1 R7_CH2.1 TB1.6 U4_CH2.3 | length 1534.2
  Top Layer w10: R7_CH2.1 1272.77,7638.03 1353,7557.8 D3_CH2.1 1377,7557.8 1520,7414.8 C20_CH2.2 C20_CH2.2@1835.1,7414.9 ; U4_CH2.3 1846,6860 2240,7254 C21_CH2.1 C21_CH2.1@2239.9,7414.9
NetC20_CH3_1: C20_CH3.1 C21_CH3.2 D3_CH3.2 F1_CH3.2 R7_CH3.2 U4_CH3.2 | length 2287.9
  Top Layer w10: F1_CH3.2 R7_CH3.2 D3_CH3.2 C20_CH3.1 1835.2,6200 C21_CH3.2 1785,5745 1785,5419.5 1809.5,5395 U4_CH3.2
NetC20_CH3_2: C20_CH3.2 C21_CH3.1 D3_CH3.1 R7_CH3.1 TB1.10 U4_CH3.3 | length 1534.2
  Top Layer w10: R7_CH3.1 1272.77,6123.03 1353,6042.8 D3_CH3.1 1377,6042.8 1520,5899.8 C20_CH3.2 C20_CH3.2@1835.1,5899.9 ; U4_CH3.3 1846,5345 2240,5739 C21_CH3.1 C21_CH3.1@2239.9,5899.9
NetC20_CH4_1: C20_CH4.1 C21_CH4.2 D3_CH4.2 F1_CH4.2 R7_CH4.2 U4_CH4.2 | length 2287.9
  Top Layer w10: F1_CH4.2 R7_CH4.2 D3_CH4.2 C20_CH4.1 1835.2,4690 C21_CH4.2 1785,4235 1785,3909.5 1809.5,3885 U4_CH4.2
NetC20_CH4_2: C20_CH4.2 C21_CH4.1 D3_CH4.1 R7_CH4.1 TB1.14 U4_CH4.3 | length 1534.2
  Top Layer w10: R7_CH4.1 1272.77,4613.03 1353,4532.8 D3_CH4.1 1377,4532.8 1520,4389.8 C20_CH4.2 C20_CH4.2@1835.1,4389.9 ; U4_CH4.3 1846,3835 2240,4229 C21_CH4.1 C21_CH4.1@2239.9,4389.9
NetC22_CH1_2: C22_CH1.2 C22_CH2.2 C22_CH3.2 C22_CH4.2 C30.1 C32.1 C33.2 U4_CH1.1 U4_CH2.1 U4_CH3.1 U4_CH4.1 U5.6 U6.6 | length 7121.8
  Top Layer w10: U4_CH4.1 1871.5,3935 2047.96,4111.46 2047.96,4251.16 2224.42,4427.62 2295.86,4427.62 2338.48,4385 C22_CH4.2 ; U4_CH3.1 1871.5,5445 2047.96,5621.46 2047.96,5761.16 2224.42,5937.62 2295.86,5937.62 2338.48,5895 C22_CH3.2 ; U4_CH2.1 1871.5,6960 2047.96,7136.46 2047.96,7276.16 2224.42,7452.62 2295.86,7452.62 2338.48,7410 C22_CH2.2 ; U4_CH1.1 1876.5,8460.2 2052.96,8636.65 2052.96,8776.36 2229.42,8952.82 2300.86,8952.82 2343.48,8910.2 C22_CH1.2 ; U5.6 5118.98,7435 C30.1 ; C32.1 C33.2 5956.73,8845 6153.98,8647.76 6153.98,8309 6069.09,8224.11 6044.46,8224.11 U6.6
  Bottom Layer w10: C30.1 5331.22,7425 5678.98,7772.76 5678.98,8665 C33.2
NetC24_CH1_2: C24_CH1.2 R8_CH1.2 U6.7 | length 303.8
  Top Layer w10: R8_CH1.2 2465,8480.2 C24_CH1.2
NetC24_CH2_2: C24_CH2.2 R8_CH2.2 U6.8 | length 303.8
  Top Layer w10: R8_CH2.2 2460,6980 C24_CH2.2
NetC24_CH3_2: C24_CH3.2 R8_CH3.2 U6.9 | length 303.8
  Top Layer w10: R8_CH3.2 2460,5465 C24_CH3.2
NetC24_CH4_2: C24_CH4.2 R8_CH4.2 U6.10 | length 303.8
  Top Layer w10: R8_CH4.2 2460,3955 C24_CH4.2
NetC35_2: C35.2 U6.27 Y1.2 | length 526.6
  Top Layer w10: U6.27 6330.39,8325.75 6403.23,8252.91 Y1.2 6422.91,8248.98 C35.2
NetC38_2: C38.2 U6.28 Y1.1 | length 314.8
  Top Layer w10: U6.28 Y1.1 C38.2
NetCA_1: CA.1 CR6.2 L3.2 QC.5 QC.6 QC.7 QC.8 QD.1 QD.2 QD.3 U3.24 | length 5647
  Top Layer w10: CA.1 2550.29,2272.21 QD.1 QD.2 QD.3 2686.55,2172.21 2846.85,2011.91 2935,2011.91 QC.6@3095.29,1851.61 ; U3.24 2695.29,1587.05 2695.29,1767.21 2756.87,1828.78 QC.8 QC.7 QC.6 ; QC.5 QC.6 ; L3.2 4140,1030 4762.23,1030 4768.09,1035.86 4768.09,2094.41 4653.31,2209.19 3182.28,2209.19 3095.29,2122.21 QC.6@3095.29,1851.61 ; QC.6 QC.6@3095.29,1851.61
NetCA_2: CA.2 CR4.1 U3.27 | length 1553.3
  Top Layer w10: U3.27 2594.82,1962.68 2515.29,2042.21 CA.2 2476.67,2175.83 2476.67,2253.2 2558.17,2334.71 CR4.1
NetCB_1: CB.1 CR3.1 U3.14 | length 974
  Top Layer w10: CB.1 U3.14 ; v1(2720.29,1917.21) 2852.79,1917.21 CR3.1
  Bottom Layer w10: CB.1 2712.67,1377.56 2712.67,1634.33 2720.29,1641.95 v1(2720.29,1917.21)
NetCB_2: CB.2 CR5.1 L3.1 QA.1 QA.2 QA.3 QB.5 QB.6 QB.7 QB.8 U3.17 | length 2009.7
  Top Layer w10: CB.2 2761.55,1159.71 2865.29,1263.45 QA.1 ; U3.17 2691.69,1415.81 2765.29,1342.21 QA.3 ; QA.3@2765.29,1263.45 QA.3 ; L3.1 3555.29,1707.21 3322.79,1474.71 CR5.1 3287.79,1474.71 3269.29,1456.21 3269.29,1406.8 3249.7,1387.21 QB.8 QB.7 QB.6 QB.5 3098.02,1237.21 3072.21,1211.4 2973.02,1211.4 2898.13,1286.28 QA.1 ; QA.3 QA.2 QA.1
NetCc1_2: Cc1.2 R1.1 | length 491.3
  Top Layer w10: Cc1.2 2000.77,1214.23 R1.1
NetCc2_2: Cc2.2 R1.2 U3.3 | length 469.1
  Top Layer w10: Cc2.2 R1.2 2192.5,1514.23 2211.44,1495.3 2351.29,1495.3 2370.23,1514.23 U3.3
NetCF_2: CF.2 R6.2 U3.23 | length 986.6
  Top Layer w10: U3.23 2712.45,1533.92 2713.24,1534.71 CF.2
  Bottom Layer w10: R6.2 2770.29,734.71 CF.2
NetCR1_1: CR1.1 L1.1 U1.1 | length 737.3
  Top Layer w10: CR1.1 5777.5,1967.5 5796,1986 5847.59,1986 6036.59,2175 L1.1 6095,2398 U1.1
NetCR2_1: CR2.1 L2.1 U2.1 | length 653.4
  Top Layer w10: CR2.1 5919,402.5 L2.1 5924,911 U2.1
NetCR3_2: CR3.2 CR4.2 CVcc.2 U3.21 | length 1305
  Top Layer w10: U3.21 2728.96,1494.55 2746.43,1477.08 2867.29,1477.08 2908.92,1518.71 2908.92,1590.65 2855.29,1644.27 CR3.2 3152.79,1734.71 CVcc.2 3236.67,1895.83 3236.67,2016.9 3275.29,2055.52 CR4.2
NetCR5_2: CR5.2 QB.1 QB.2 QB.3 QC.1 QC.2 QC.3 R5.1 RSense.1 | length 3544.6
  Top Layer w10: QC.1 QC.2 QC.3 3095.29,1648.47 3121.11,1674.28 3290.72,1674.28 CR5.2 ; QB.3 QB.2 QB.1 3046.55,1387.21 3269.29,1609.95 3269.29,1641.21 3287.79,1659.71 CR5.2 ; v1(3475.29,1842.21) 3467.64,1834.55 3467.64,1804.55 3322.79,1659.71 CR5.2
  Bottom Layer w10: R5.1 2525.29,2942.21 2585.29,3002.21 3541.88,3002.21 3547.73,2996.35 3547.73,2744.77 RSense.1 3590.29,1957.21 v1(3475.29,1842.21)
NetCss_2: Css.2 U3.31 | length 238.4
  Top Layer w10: U3.31 Css.2
NetD1_2: D1.2 J1.2 | length 12.1
  Top Layer w10: J1.2@679.92,3872.44 J1.2@688.47,3863.9
NetD2_2: D2.2 P1.11
NetF1_CH1_1: F1_CH1.1 TB1.1
NetF1_CH2_1: F1_CH2.1 TB1.5
NetF1_CH3_1: F1_CH3.1 TB1.9
NetF1_CH4_1: F1_CH4.1 TB1.13
NetP1_1: P1.1 R11.2
NetP1_2: P1.2 U8.2
NetP1_3: P1.3 R12.2
NetP1_4: P1.4 U9.2
NetP1_5: P1.5 R13.2
NetP1_6: P1.6 U10.2
NetP1_7: P1.7 R9.2
NetP1_8: P1.8 U7.2
NetQA_4: QA.4 U3.15 | length 166.9
  Top Layer w10: U3.15 2614.6,1388.06 2614.6,1367.2 2668.83,1312.97 2708.48,1312.97 2715.29,1306.16 QA.4
NetQB_4: QB.4 U3.18 | length 444
  Top Layer w10: U3.18 2707.41,1435.49 2722.82,1420.08 2796.02,1420.08 2927.62,1288.48 2978.89,1237.21 QB.4
NetQC_4: QC.4 U3.20 | length 573.2
  Top Layer w10: U3.20 2721.78,1474.86 2738.56,1458.08 3000.58,1458.08 3145.29,1602.8 QC.4
NetQD_4: QD.4 U3.26 | length 561.3
  Top Layer w10: U3.26 2614.51,1829.09 2663.72,1878.31 QD.4
NetR2_1: R2.1 R3.1 U3.4 | length 360.4
  Top Layer w10: U3.4 2410.14,1494.55 R3.1 2335.29,1417.21 2470.29,1282.21 R2.1
NetR3_2: R3.2 R17.1 | length 155
  Top Layer w10: R17.1 R3.2
NetR8_CH1_1: R8_CH1.1 U4_CH1.6 | length 117.8
  Top Layer w10: U4_CH1.6 R8_CH1.1
NetR8_CH2_1: R8_CH2.1 U4_CH2.6 | length 117.8
  Top Layer w10: U4_CH2.6 R8_CH2.1
NetR8_CH3_1: R8_CH3.1 U4_CH3.6 | length 117.8
  Top Layer w10: U4_CH3.6 R8_CH3.1
NetR8_CH4_1: R8_CH4.1 U4_CH4.6 | length 117.8
  Top Layer w10: U4_CH4.6 R8_CH4.1
NetR9_1: R9.1 U7.1 | length 155.5
  Top Layer w10: R9.1 U7.1
NetR10_1: R10.1 U7.4 | length 165.5
  Top Layer w10: U7.4 R10.1
NetR11_1: R11.1 U8.1 | length 155
  Top Layer w10: R11.1 U8.1
NetR12_1: R12.1 U9.1 | length 160
  Top Layer w10: R12.1 U9.1
NetR13_1: R13.1 U10.1 | length 155.5
  Top Layer w10: R13.1 U10.1
NetR14_1: R14.1 U8.4 | length 161
  Top Layer w10: U8.4 R14.1
NetR15_1: R15.1 U9.4 | length 161
  Top Layer w10: U9.4 R15.1
NetR16_1: R16.1 U10.4 | length 165.5
  Top Layer w10: U10.4 R16.1
NetU6_19: U6.19
NetU6_20: U6.20
NetU6_21: U6.21
NetU6_22: U6.22
NetU6_23: U6.23
NetU6_24: U6.24
pads on no net: J1.3 L3.3 P1.9 P1.10 U2.6 U3.6 U3.9 U3.12 U3.13 U3.16 U3.25 U3.28 U3.29 U3.30 U3.32 U5.1 U5.3 U5.5 U5.7 U5.8

## Text inside footprints (layer, text, board x,y; h text height)
C1: Top Overlay "+" at 5304.01,2610.15 h59.06 r90
C3: Top Overlay "+" at 7049.01,2610.15 h59.06 r90
C5: Top Overlay "+" at 5319.01,1045.15 h59.06 r90
C7: Top Overlay "+" at 6844.01,1045.15 h59.06 r90
C9: Top Overlay "+" at 1324.3,804.86 h59.06 r90
C19: Top Overlay "+" at 1319.3,2372.36 h59.06 r90
C20_CH1: Top Overlay "+" at 1869.01,9385.15 h59.06 r90
C20_CH2: Top Overlay "+" at 1864.01,7884.96 h59.06 r90
C20_CH3: Top Overlay "+" at 1864.01,6369.96 h59.06 r90
C20_CH4: Top Overlay "+" at 1864.01,4859.96 h59.06 r90
C23_CH1: Top Overlay "+" at 1184.01,8745.35 h59.06 r90
C23_CH2: Top Overlay "+" at 1179.01,7245.15 h59.06 r90
C23_CH3: Top Overlay "+" at 1179.01,5730.15 h59.06 r90
C23_CH4: Top Overlay "+" at 1179.01,4220.15 h59.06 r90
C26: Top Overlay "+" at 4122.98,7655.15 h59.06 r90
C30: Top Overlay "+" at 5157.98,7595.15 h59.06 r90
C31: Top Overlay "+" at 4822.98,9015.15 h59.06 r90
C32: Top Overlay "+" at 5452.98,9015.15 h59.06 r90
C34: Top Overlay "+" at 4177.98,9015.15 h59.06 r90
L3: Top Overlay "*" at 3847.79,1949.71 h50 r270; Mechanical 13 "*" at 3847.79,1842.21 h50 r270
U2: Top Overlay "*" at 5845,894 h50; Mechanical 13 "*" at 5845,894 h50
U3: Top Overlay "*" at 2430.29,1569.71 h50; Mechanical 13 "*" at 2472.09,1538.45 h50
U4_CH1: Top Overlay "*" at 1810.25,8476.2 h50; Mechanical 13 "*" at 1864,8430.7 h50
U4_CH2: Top Overlay "*" at 1805.25,6976 h50; Mechanical 13 "*" at 1859,6930.5 h50
U4_CH3: Top Overlay "*" at 1805.25,5461 h50; Mechanical 13 "*" at 1859,5415.5 h50
U4_CH4: Top Overlay "*" at 1805.25,3951 h50; Mechanical 13 "*" at 1859,3905.5 h50
U5: Top Overlay "*" at 4493.98,7552 h50; Mechanical 13 "*" at 4547.48,7505.5 h50
U7: Top Overlay "*" at 4066.98,6869.76 h50; Mechanical 13 "*" at 4128.48,6812.26 h50
U8: Top Overlay "*" at 4066.48,6484.76 h50; Mechanical 13 "*" at 4127.98,6427.26 h50
U9: Top Overlay "*" at 4071.48,6094.76 h50; Mechanical 13 "*" at 4132.98,6037.26 h50
U10: Top Overlay "*" at 4071.48,5726.5 h50; Mechanical 13 "*" at 4132.98,5669 h50